# Altium PCB SM_thruster_ctrl_and_pressure_sensor_single_sided.PcbDoc
Units mm, origin at the board's own origin, x right, y up, seen from the top; angles counter-clockwise.
Board outline 65.02 x 71.37 mm, 2 copper layers (Top Layer, Bottom Layer); 26 components, 25 nets, 108 pads, 10 vias.
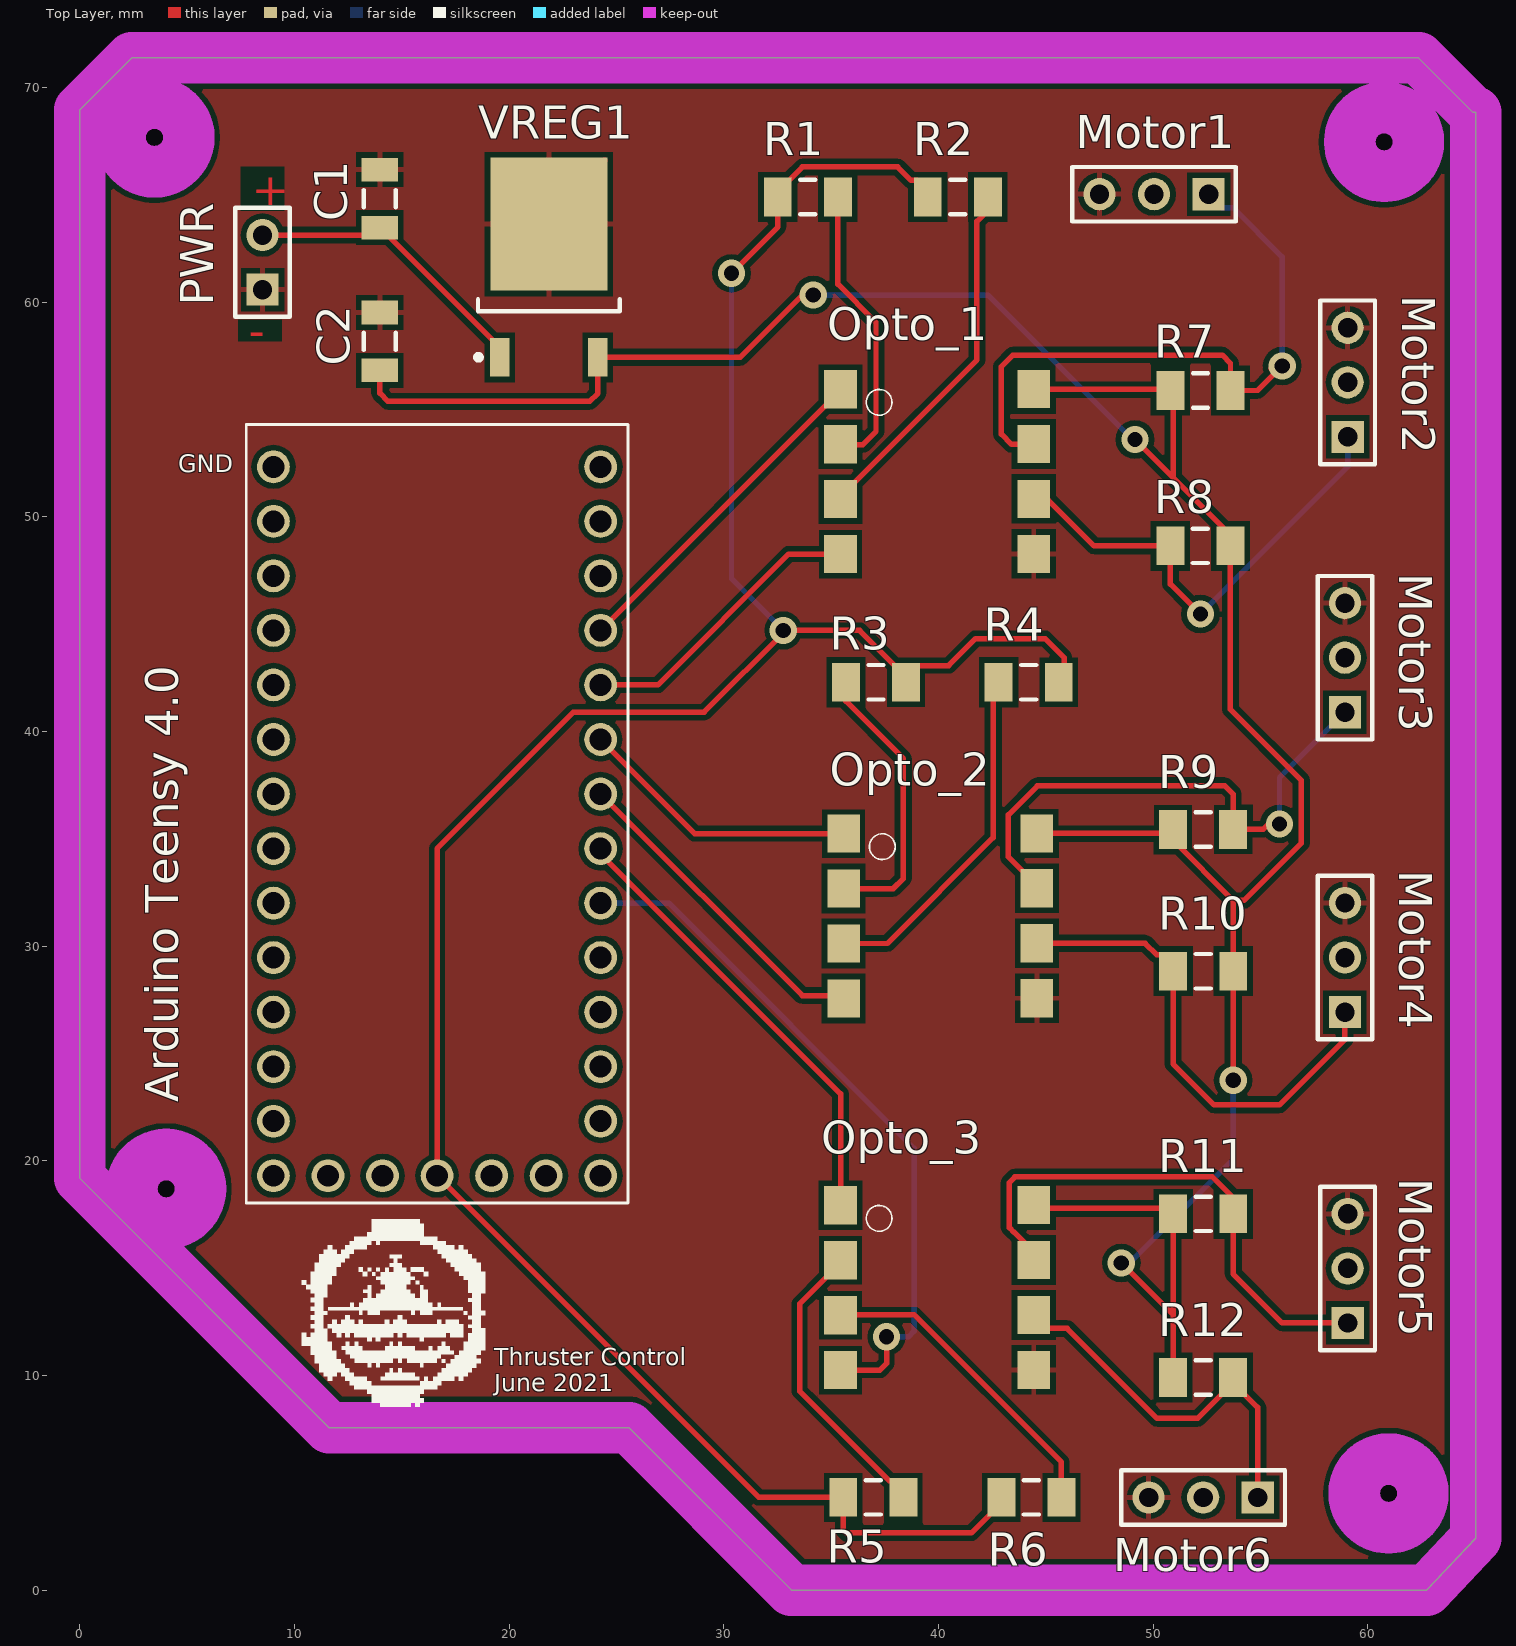
[diagram p0: Top Layer view]
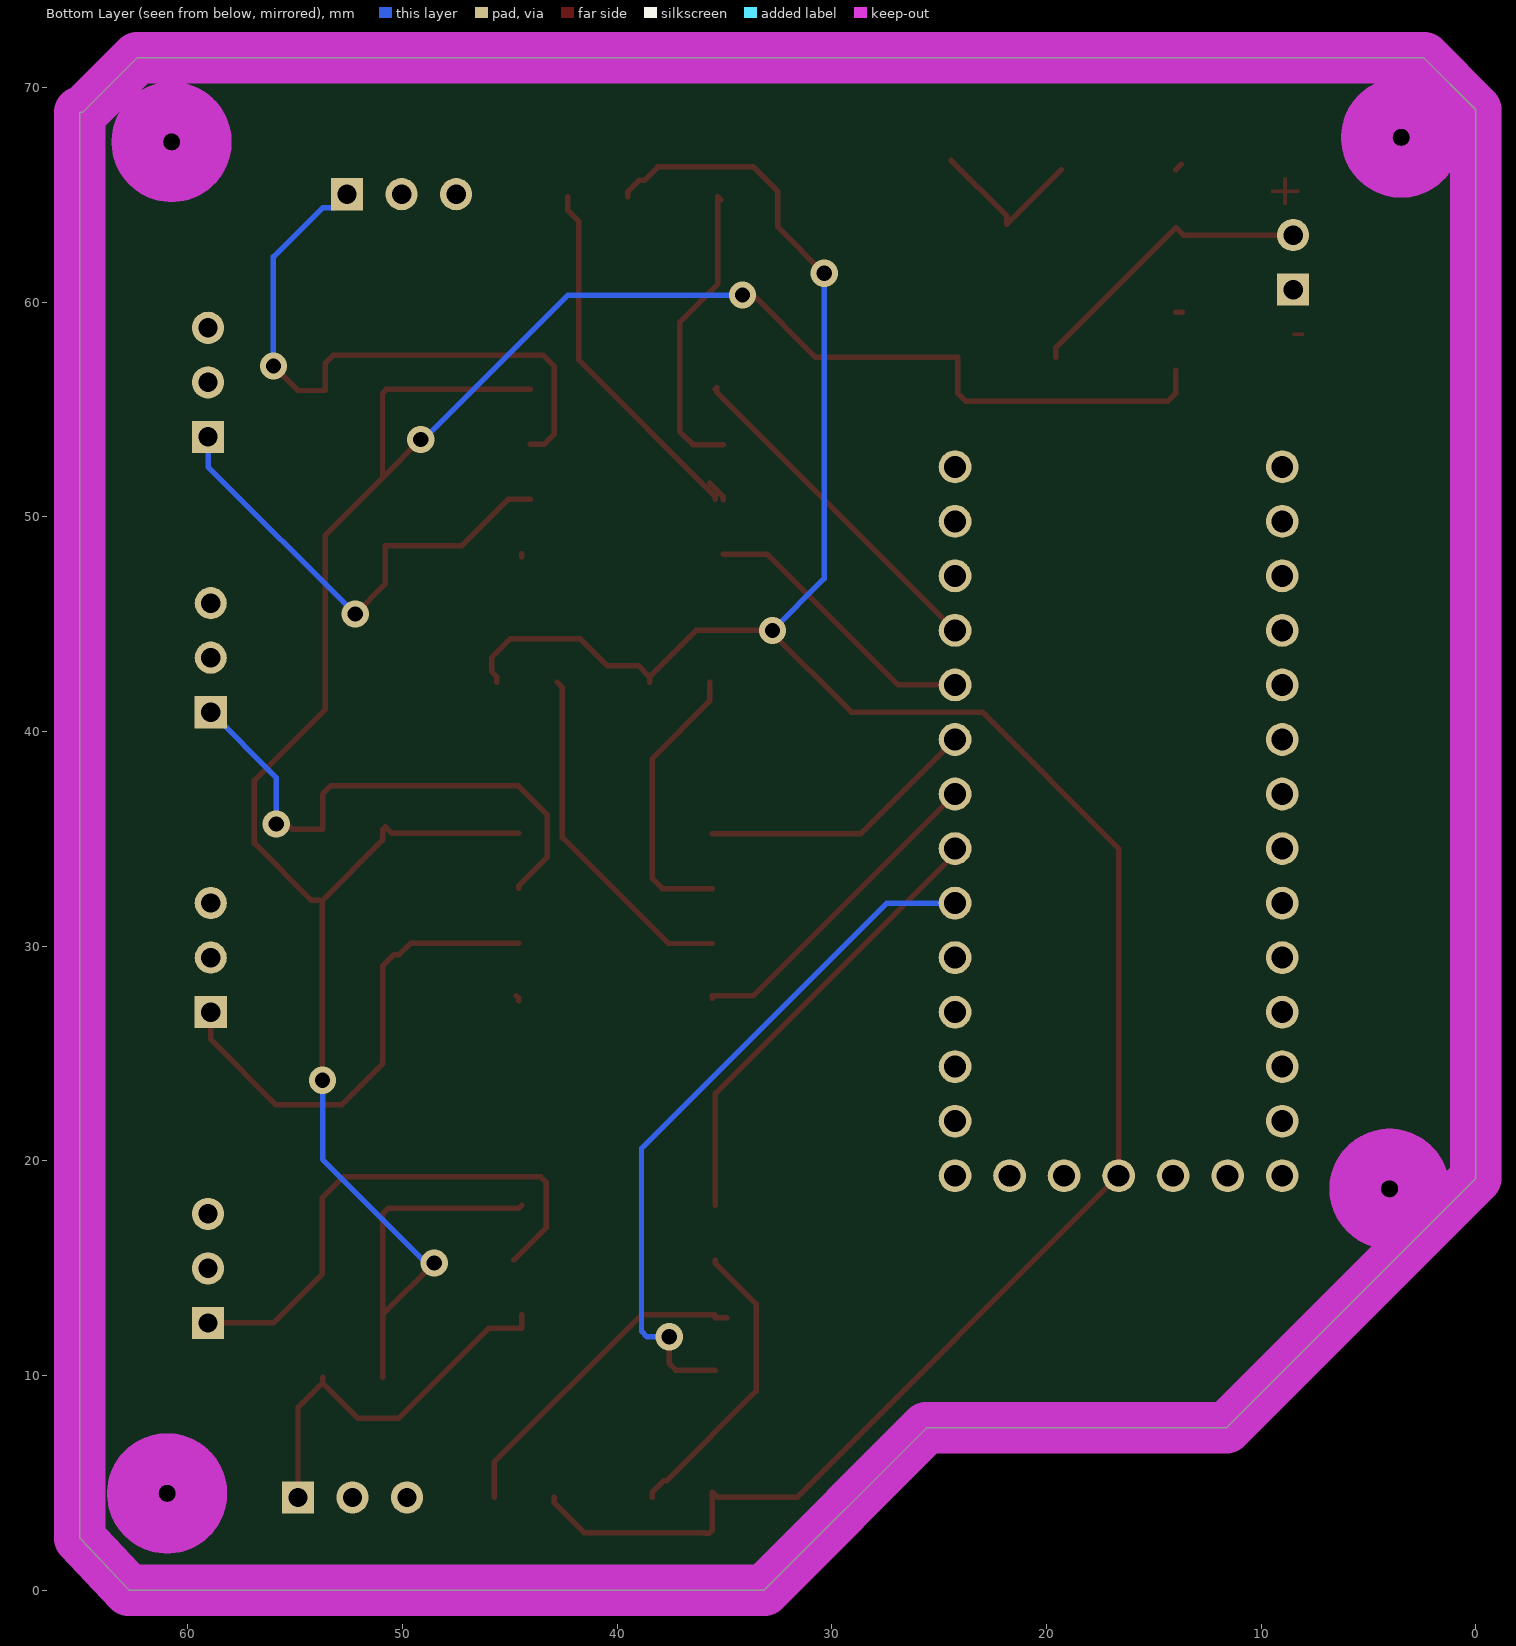
[diagram p1: Bottom Layer view, seen from below]

## Layer stack, top to bottom
Top Solder: solder mask 0.0102, Solder Resist, Dk 3.5
Top Layer: signal copper 0.0356
Dielectric 1: dielectric 0.32, FR-4, Dk 4.8
Bottom Layer: signal copper 0.0356
Bottom Solder: solder mask 0.0102, Solder Resist, Dk 3.5

## Board outline
62.357,71.374 64.897,68.834 65.024,68.834 65.024,2.413 62.738,0 33.147,0 25.59,7.556 11.62,7.556 0,19.177 0,68.961 2.413,71.374
cut-out: 4.018,17.092 cw(c4.018,18.692) 2.418,18.692 cw(c4.018,18.692) 4.018,20.292 cw(c4.018,18.692) 5.618,18.692 cw(c4.018,18.692)
cut-out: 60.752,65.86 cw(c60.752,67.46) 59.152,67.46 cw(c60.752,67.46) 60.752,69.06 cw(c60.752,67.46) 62.352,67.46 cw(c60.752,67.46)
cut-out: 60.96,2.905 cw(c60.96,4.505) 59.36,4.505 cw(c60.96,4.505) 60.96,6.105 cw(c60.96,4.505) 62.56,4.505 cw(c60.96,4.505)
cut-out: 3.475,66.068 cw(c3.475,67.668) 1.875,67.668 cw(c3.475,67.668) 3.475,69.268 cw(c3.475,67.668) 5.075,67.668 cw(c3.475,67.668)

## Design rules (kind name [scope] priority, off if disabled: settings)
Clearance [All] p1: gap=0.254 ignorepadtopadclearanceinfootprint=FALSE except(0: Arc-Hole Track-Hole SMDPad-Hole THPad-Hole Via-Hole Fill-Hole Poly-Hole Region-Hole Text-Hole)
PolygonConnect [All] p1: connectstyle=Relief reliefconductorwidth=0.254 reliefentries=4 polygonreliefangle="90 Angle" airgapwidth=0.254
RoutingVias [All] p1: holewidth=0.711 width=1.27 viastyle="Through Hole" minholewidth=0.711 minwidth=1.27 maxholewidth=0.711 maxwidth=1.27
SolderMaskExpansion [All] p1: expansion=0.102
Width [All] p1: maxlimit=0.254 minlimit=0.254 preferedwidth=0.254
30 further rules are at their usual default settings.

## Classes and differential pairs
component class SM_thruster_ctrl_and_pressure_sensor: C1 C2 Motor1 Motor2 Motor3 Motor4 Motor5 Motor6 Opto_1 Opto_2 PWR R1 R2 R3 R4 R5 R6 R7 R8 R9 R10 R11 R12 VREG1

## Components (designator, comment, footprint, x,y, rotation, side; value= is the part's Value field where it differs from the comment)
"Arduino Teensy 4.0" "DEV-15583" MODULE_DEV-15583 16.637,35.814 r0 top
C1 "Cap Semi" C1206 13.97,64.817 r90 top value=330nF
C2 "Cap Semi" C1206 13.97,58.166 r270 top value=100nF
Motor1 "Header 3" HDR1X3 52.578,65.024 r180 top
Motor2 "Header 3" HDR1X3 59.055,53.721 r90 top
Motor3 "Header 3" HDR1X3 58.928,40.894 r90 top
Motor4 "Header 3" HDR1X3 58.928,26.924 r90 top
Motor5 "Header 3" HDR1X3 59.055,12.446 r90 top
Motor6 "Header 3" HDR1X3 54.864,4.318 r180 top
Opto_1 "HCPL2531 Surface Mount" HCPL2531 44.433,52.83 r90 top
Opto_2 "HCPL2531 Surface Mount" HCPL2531 44.577,32.131 r90 top
Opto_3 "HCPL2531 Surface Mount" HCPL2531 44.433,14.817 r90 top
PWR "Header 2" HDR1X2 8.509,60.579 r90 top
R1 "300" RESC3216X70X50NL20T25 33.909,64.897 r0 top
R2 "300" RESC3216X70X50NL20T25 40.894,64.897 r0 top
R3 "300" RESC3216X70X50NL20T25 37.084,42.291 r180 top
R4 "300" RESC3216X70X50NL20T25 44.196,42.291 r180 top
R5 "300" RESC3216X70X50NL20T25 36.957,4.318 r0 top
R6 "300" RESC3216X70X50NL20T25 44.323,4.318 r0 top
R7 "4k" RESC3216X70X50NL20T25 52.197,55.88 r180 top
R8 "4k" RESC3216X70X50NL20T25 52.194,48.641 r0 top
R9 "4k" RESC3216X70X50NL20T25 52.321,35.433 r180 top
R10 "4k" RESC3216X70X50NL20T25 52.324,28.829 r0 top
R11 "4k" RESC3216X70X50NL20T25 52.324,17.526 r180 top
R12 "4k" RESC3216X70X50NL20T25 52.321,9.906 r180 top
VREG1 "L78M05CDT-TR" TO-252_L 21.844,61.627 r90 top

## Footprints (in the part's own frame and the unit in brackets; to place one, negate y for a bottom-side part, rotate by r counter-clockwise, add the part's x,y. Pads: shape width x height; smd on the part's side, far side on the other; paste and mask are expansions set on the pad)
C1206 [mm] "Chip Capacitor, Body 3.2x1.6mm, IPC High Density"
  rect 1.1x1.7 smd: 1(-1.35,0) 2(1.35,0)
  silkscreen extent -0.4,-0.75 0.4,0.75, body extent -1.7,-0.9 1.7,0.9, height 1.3
HCPL2531 [mm] "HCPL2531 optocoupler"
  rect 1.78x1.52 smd: 1(3.11,9) 2(0.55,9) 3(-2.01,9) 4(-4.57,9) 5(-4.56,0) 6(-2,0) 7(0.56,0) 8(3.12,0)
  silkscreen extent 1.9,6.6 3.1,7.8
HDR1X2 [mm] "Connector; Header; 2 Position"
  rect 1.5x1.5 hole 0.9: 1(0,0)
  round 1.5 hole 0.9: 2(2.54,0)
  silkscreen extent -1.27,-1.27 3.81,1.27
HDR1X3 [mm] "Connector; Header; 3 Position"
  rect 1.5x1.5 hole 0.9: 1(0,0)
  round 1.5 hole 0.9: 2(2.54,0) 3(5.08,0)
  silkscreen extent -1.27,-1.27 6.35,1.27
MODULE_DEV-15583 [mm]
  round 1.53 hole 1.02: 0(-7.62,13.97) 1(-7.62,11.43) 2(-7.62,8.89) 3(-7.62,6.35) 3.3V_1(-2.54,-16.51) 3.3V_2(7.62,11.43) 4(-7.62,3.81) 5(-7.62,1.27) 6(-7.62,-1.27) 7(-7.62,-3.81) 8(-7.62,-6.35) 9(-7.62,-8.89) 10(-7.62,-11.43) 11(-7.62,-13.97) 12(-7.62,-16.51) 13(7.62,-16.51) 14(7.62,-13.97) 15(7.62,-11.43) 16(7.62,-8.89) 17(7.62,-6.35) 18(7.62,-3.81) 19(7.62,-1.27) 20(7.62,1.27) 21(7.62,3.81) 22(7.62,6.35) 23(7.62,8.89) G1(-7.62,16.51) G2(0,-16.51) G3(7.62,13.97) ON-OFF(5.08,-16.51) PGM(2.54,-16.51) VBAT(-5.08,-16.51) VIN(7.62,16.51)
  silkscreen extent -8.89,-17.78 8.89,18.48
RESC3216X70X50NL20T25 [mm] "Chip Resistor, 2-Leads, Body 3.20x1.60mm, IPC Medium Density"
  rect 1.3x1.8 smd: 1(-1.4,0) 2(1.4,0)
  silkscreen extent -0.35,-0.8 0.35,0.8, body extent -1.7,-0.9 1.7,0.9, height 0.7
TO-252_L [mm] "D-PAK, 4-Leads, Body 6.1x6.5mm, Pitch 2.28mm, Lead Span 9.7mm, IPC High Density"
  rect 1.8x0.9 smd: 1(-4.2,2.28) 3(-4.2,-2.28)
  rect 6.2x5.45 smd: 4(2,0)
  silkscreen extent -4.32,-3.3 -1.5,3.4, body extent -2.05,-3.3 4.15,3.3, height 2.4

## Part data
"Arduino Teensy 4.0": "RT1062 Teensy 4.0 i.MX ARM® Cortex®-M7 MPU Embedded Evaluation Board", Package=None, ComponentLink1Description="Download Link", ComponentLink1URL=https://www.snapeda.com/parts/DEV-15583/SparkFun%20Electronics/view-part/?company=Subbots&amp;ref=search&amp;t=teensy+4.0, Digi-Key_Part_Number=1568-DEV-15583-ND, Digi-Key_Purchase_URL=https://www.digikey.com/product-detail/en/sparkfun-electronics/DEV-15583/1568-DEV-15583-ND/10384551?utm_source=snapeda&utm_medium=aggregator&utm_campaign=symbol, MF="SparkFun Electronics", MP=DEV-15583, SnapEDA_Link=https://www.snapeda.com/parts/DEV-15583/SparkFun%20Electronics/view-part/4001229/?ref=snap
C1 C2: "Capacitor (Semiconductor SIM Model)", LatestRevisionDate=29-May-2009, LatestRevisionNote="IPC-7351 Footprint Added.", PackageDescription="Chip Capacitor", PackageReference=C1206, Published=8-Jun-2000, Publisher="Altium Limited"
Motor1 Motor2 Motor3 Motor4 Motor5 Motor6: "Header, 3-Pin", LatestRevisionDate=17-Jul-2002, LatestRevisionNote="Re-released for DXP Platform.", Publisher="Altium Limited"
Opto_1 Opto_2 Opto_3: library part HCPL2531, ComponentLink1Description=Datasheet, ComponentLink1URL=https://www.onsemi.com/pub/Collateral/HCPL2531-D.PDF
PWR: "Header, 2-Pin", LatestRevisionDate=17-Jul-2002, LatestRevisionNote="Re-released for DXP Platform.", Publisher="Altium Limited"
R1 R3 R5 R7 R9 R11: library part CMP-2003-04450-1, Manufacturer=Panasonic, Part Number=ERA8AEB301V
R2 R4 R6 R8 R10 R12: library part CMP-2003-04450-1, "ERA8AEB301V", Manufacturer=Panasonic, Part Number=ERA8AEB301V
VREG1: library part CMP-0244-00178-1, "Positive Voltage Regulator, 5V, 3-Pin DPAK, Tape and Reel", ComponentLink1Description="Manufacturer URL", ComponentLink1URL=http://www.st.com, ComponentLink2Description=Datasheet, ComponentLink2URL=http://www.st.com/internet/com/TECHNICAL_RESOURCES/TECHNICAL_LITERATURE/DATASHEET/CD00000447.pdf, DatasheetVersion=1/11/2010, PackageDescription="3-Pin Transistor Outline Package 2.28 mm Pitch, 9.7 mm Lead Span (DPAK)", PackageReference=TO-252, PackageVersion=2011

## Via types
v1: diameter 1.27, hole 0.711, Top Layer to Bottom Layer, 10 vias

## Nets (pads, with @x,y where several pads share a name; then routed paths per layer and width w, separated by ;. In a path a pad name is that pad's centre, name@x,y a point inside that pad or via, vN(x,y) a via of type N, cw(c..) or ccw(c..) an arc to the next point about the centre after c; other vN are vias at no path point)
5V: "Arduino Teensy 4.0.VIN"
5Vcc: C2.2 Opto_1.8 Opto_2.8 Opto_3.8 R7.2 R8.2 R9.2 R10.2 R11.2 R12.2 VREG1.3 | length 126.6
  Top Layer w0.254: C2.2 13.97,55.753 14.351,55.372 23.749,55.372 24.124,55.747 VREG1.3 30.757,57.427 v1@33.655,60.325 ; Opto_1.8@44.052,55.93 50.747,55.93 R7.2 50.927,55.75 50.927,51.943 50.863,51.88 ; Opto_3.8 44.59,17.78 50.67,17.78 R11.2 50.924,12.83 ; Opto_2.8 50.488,35.251 R9.2@50.795,35.558 ; v1(48.514,15.24) 50.924,12.83 ; v1(49.149,53.594) 50.863,51.88 ; R12.2 50.924,9.909 50.924,12.83 ; R9.2 50.921,34.931 53.724,32.128 ; v1(53.721,23.749) 53.724,23.752 R10.2 53.724,32.128 ; 50.863,51.88 53.594,49.149 R8.2 53.594,41.021 56.896,37.719 56.896,34.798 54.226,32.128 53.724,32.128
  Bottom Layer w0.254: v1(34.163,60.325) 42.291,60.325 49.022,53.594 v1(49.149,53.594) ; v1(48.514,15.24) 48.895,15.24 53.721,20.066 v1(53.721,23.749)
GND: C1.2 C2.1 Motor1.3 Motor2.3 Motor3.3 Motor4.3 Motor5.3 Motor6.3 Opto_1.5 Opto_2.5 Opto_3.5 PWR.1 VREG1.4 | length 8.8
  Top Layer w0.254: C2.1@13.67,59.516 C2.1 ; C1.2@13.716,66.421 C1.2 ; VREG1.4@19.304,66.167 VREG1.4 21.844,64.002 VREG1.4@24.442,66.6 ; Opto_1.5@44.433,48.14 Opto_1.5 ; Opto_2.5@44.577,27.441 Opto_2.5 Opto_2.5@44.692,27.686 ; Motor4.3 Motor4.3@59.055,32.004
"MCU GND": "Arduino Teensy 4.0.G2" R1.1 R2.1 R3.1 R4.1 R5.1 R6.1 | length 117.9
  Top Layer w0.254: v1(30.353,61.341) 32.509,63.497 R1.1 32.509,65.147 33.656,66.294 38.097,66.294 38.721,65.67 38.971,65.67 39.494,65.147 R2.1 ; R3.1 R3.1@38.484,42.541 ; R6.1 42.923,4.068 41.522,2.667 35.941,2.667 35.919,2.645 35.709,2.645 35.557,2.797 R5.1 35.557,4.568 35.307,4.318 31.623,4.318 16.637,19.304 16.637,34.544 22.987,40.894 29.083,40.894 32.893,44.704 36.321,44.704 R3.1@38.484,42.541 ; R4.1 45.596,42.541 45.847,42.792 45.847,43.434 44.958,44.323 41.723,44.323 40.464,43.064 39.007,43.064 R3.1@38.484,42.541
  Bottom Layer w0.254: v1(30.353,61.341) 30.353,47.117 v1(32.766,44.704)
"NetArduino Teensy 4.0_11": "Arduino Teensy 4.0.11"
"NetArduino Teensy 4.0_12": "Arduino Teensy 4.0.12"
"NetArduino Teensy 4.0_18": "Arduino Teensy 4.0.18" Opto_3.4 | length 32.8
  Top Layer w0.254: Opto_3.4 37.263,10.247 37.575,10.559 v1(37.575,11.801)
  Bottom Layer w0.254: 24.257,32.004 27.432,32.004 38.862,20.574 38.862,12.065 38.598,11.801 v1(37.575,11.801)
"NetArduino Teensy 4.0_19": "Arduino Teensy 4.0.19" Opto_3.1 | length 21.2
  Top Layer w0.254: 24.257,34.544 24.257,34.29 35.433,23.114 Opto_3.1
"NetArduino Teensy 4.0_20": "Arduino Teensy 4.0.20" Opto_2.4 | length 15.3
  Top Layer w0.254: 24.257,37.084 33.65,27.691 35.577,27.691 Opto_2.4
"NetArduino Teensy 4.0_21": "Arduino Teensy 4.0.21" Opto_2.1 | length 13.1
  Top Layer w0.254: 24.257,39.624 28.64,35.241 Opto_2.1
"NetArduino Teensy 4.0_22": "Arduino Teensy 4.0.22" Opto_1.4 | length 13.3
  Top Layer w0.254: 24.257,42.164 26.924,42.164 33.02,48.26 Opto_1.4@35.052,48.26
"NetArduino Teensy 4.0_23": "Arduino Teensy 4.0.23" Opto_1.1 | length 16
  Top Layer w0.254: 24.257,44.704 35.366,55.813 35.366,56.007 Opto_1.1
NetBattery?_2: C1.1 PWR.2 VREG1.1 | length 14
  Top Layer w0.254: PWR.2 13.622,63.119 C1.1 13.974,63.467 19.564,57.877 VREG1.1
NetMotor1_1: Motor1.1 Opto_1.7 R7.1 | length 29.9
  Top Layer w0.254: Opto_1.7@44.052,53.37 43.404,53.37 42.926,53.848 42.926,56.993 43.461,57.528 53.216,57.528 53.597,57.147 R7.1 54.864,55.88 v1(56.007,57.023) 55.626,57.023 v1@55.499,56.896
  Bottom Layer w0.254: Motor1.1 53.201,64.401 53.709,64.401 56.007,62.103 v1(56.007,57.023)
NetMotor2_1: Motor2.1 Opto_1.6 R8.1 | length 22.7
  Top Layer w0.254: Opto_1.6@44.052,50.81 45.075,50.81 47.244,48.641 R8.1 50.8,48.635 50.8,46.863 v1(52.197,45.466)
  Bottom Layer w0.254: v1(52.197,45.466) 59.055,52.324 59.055,53.213 Motor2.1@59.563,53.721
NetMotor3_1: Motor3.1 Opto_2.7 R9.1 | length 25.5
  Top Layer w0.254: Opto_2.7 44.577,32.821 43.249,34.149 43.249,36.112 44.602,37.465 53.34,37.465 53.721,37.084 R9.1 55.118,35.433 55.372,35.687 v1(55.88,35.687)
  Bottom Layer w0.254: v1(55.88,35.687) 55.88,37.846 Motor3.1
NetMotor4_1: Motor4.1 Opto_2.6 R10.1 | length 22.7
  Top Layer w0.254: Opto_2.6 49.622,30.131 50.151,29.602 50.401,29.602 50.924,29.079 R10.1 50.924,24.514 52.832,22.606 55.88,22.606 58.928,25.654 Motor4.1
NetMotor5_1: Motor5.1 Opto_3.7 R11.1 | length 25
  Top Layer w0.254: Opto_3.7@44.811,15.387 43.532,16.666 43.515,16.666 43.292,16.889 43.292,18.985 43.557,19.25 52.759,19.25 53.724,18.285 R11.1 53.724,14.729 56.007,12.446 Motor5.1
NetMotor6_1: Motor6.1 Opto_3.6 R12.1 | length 18.4
  Top Layer w0.254: Opto_3.6@44.45,12.827 44.45,12.192 45.984,12.192 50.175,8.001 52.066,8.001 R12.1@53.721,9.656 ; R12.1 R12.1@53.721,9.656 ; Motor6.1 54.864,8.513 R12.1@53.721,9.656
NetOpto_1_2: Opto_1.2 R1.2 | length 14.1
  Top Layer w0.254: Opto_1.2@35.052,53.36 36.469,53.36 37.084,53.975 37.084,59.055 35.309,60.83 R1.2 R1.2@35.179,64.767
NetOpto_1_3: Opto_1.3 R2.2 | length 17.9
  Top Layer w0.254: Opto_1.3@35.052,50.8 35.052,50.93 Opto_1.3@35.685,51.563 ; Opto_1.3 35.433,50.95 41.783,57.3 41.783,63.754 42.294,64.265 R2.2
NetOpto_2_2: Opto_2.2 R3.2 | length 13.2
  Top Layer w0.254: Opto_2.2 37.888,32.681 38.354,33.147 38.354,38.735 35.684,41.405 R3.2
NetOpto_2_3: Opto_2.3 R4.2 | length 16.4
  Top Layer w0.254: Opto_2.3 37.614,30.121 42.545,35.052 42.545,42.04 R4.2
NetOpto_3_2: Opto_3.2 R5.2 | length 13.9
  Top Layer w0.254: Opto_3.2 35.433,15.237 33.528,13.332 33.528,9.271 37.708,5.091 37.834,5.091 38.357,4.568 R5.2
NetOpto_3_3: Opto_3.3 R6.2 | length 15.4
  Top Layer w0.254: Opto_3.3@34.895,12.677 35.433,12.677 Opto_3.3 35.443,12.817 38.872,12.817 45.723,5.966 R6.2
pads on no net: "Arduino Teensy 4.0.0" "Arduino Teensy 4.0.1" "Arduino Teensy 4.0.2" "Arduino Teensy 4.0.3" "Arduino Teensy 4.0.3.3V_1" "Arduino Teensy 4.0.3.3V_2" "Arduino Teensy 4.0.4" "Arduino Teensy 4.0.5" "Arduino Teensy 4.0.6" "Arduino Teensy 4.0.7" "Arduino Teensy 4.0.8" "Arduino Teensy 4.0.9" "Arduino Teensy 4.0.10" "Arduino Teensy 4.0.13" "Arduino Teensy 4.0.14" "Arduino Teensy 4.0.15" "Arduino Teensy 4.0.16" "Arduino Teensy 4.0.17" "Arduino Teensy 4.0.G1" "Arduino Teensy 4.0.G3" "Arduino Teensy 4.0.ON-OFF" "Arduino Teensy 4.0.PGM" "Arduino Teensy 4.0.VBAT" Motor1.2 Motor2.2 Motor3.2 Motor4.2 Motor5.2 Motor6.2

## Polygon pours and split planes (outlines as drawn)
GND on Top Layer "GND_L01_P014" (solid, pour order 14): 2.413,71.374 0,68.961 0,19.177 11.684,7.493 25.527,7.493 25.654,7.62 33.02,0.254 33.02,0 62.611,0 65.024,2.413 65.024,68.834 64.897,68.834 62.357,71.374
no net on Top Layer "Top Layer-No Net" (solid, pour order 0): 2.413,71.374

## Keep-outs
Keep-Out Layer:
  lines w2.4: 0,19.177 0,68.961 2.413,71.374 62.357,71.374 64.897,68.834 65.024,68.834 65.024,2.413 62.738,0 33.147,0 25.59,7.556 11.62,7.556 0,19.177 ; 1.875,67.668 cw(c3.475,67.668) 3.475,69.268 cw(c3.475,67.668) 5.075,67.668 cw(c3.475,67.668) 3.475,66.068 cw(c3.475,67.668) 1.875,67.668 ; 2.418,18.692 cw(c4.018,18.692) 4.018,20.292 cw(c4.018,18.692) 5.618,18.692 cw(c4.018,18.692) 4.018,17.092 cw(c4.018,18.692) 2.418,18.692 ; 59.152,67.46 cw(c60.752,67.46) 60.752,69.06 cw(c60.752,67.46) 62.352,67.46 cw(c60.752,67.46) 60.752,65.86 cw(c60.752,67.46) 59.152,67.46 ; 59.36,4.505 cw(c60.96,4.505) 60.96,6.105 cw(c60.96,4.505) 62.56,4.505 cw(c60.96,4.505) 60.96,2.905 cw(c60.96,4.505) 59.36,4.505

## Other copper
Top Layer:
  text "+" at 8.001,64.516 h1.52
  text "-" at 7.874,57.912 h1.52

## Silkscreen, mask and mechanical layers (free items; w line width, h text height)
Top Overlay:
  drawing of 4 lines, arcs and shapes, not listed
  text "Thruster Control / June 2021" at 19.304,9.271 h0.8

## Text inside footprints (layer, text, board x,y; h text height)
"Arduino Teensy 4.0": Top Overlay "GND" at 4.572,52.07 h0.81; Mechanical 13 "GND" at 4.572,52.07 h0.81